# Altium PCB mcb.PcbDoc (part 1 of 2)
Units mm, origin at the board's own origin, x right, y up, seen from the top; angles counter-clockwise.
Board outline 144 x 86 mm, 4 copper layers (Top Layer, GND Plane, PWR Plane, Bottom Layer), stack 1.537 mm thick; 157 components, 137 nets, 622 pads, 241 vias.
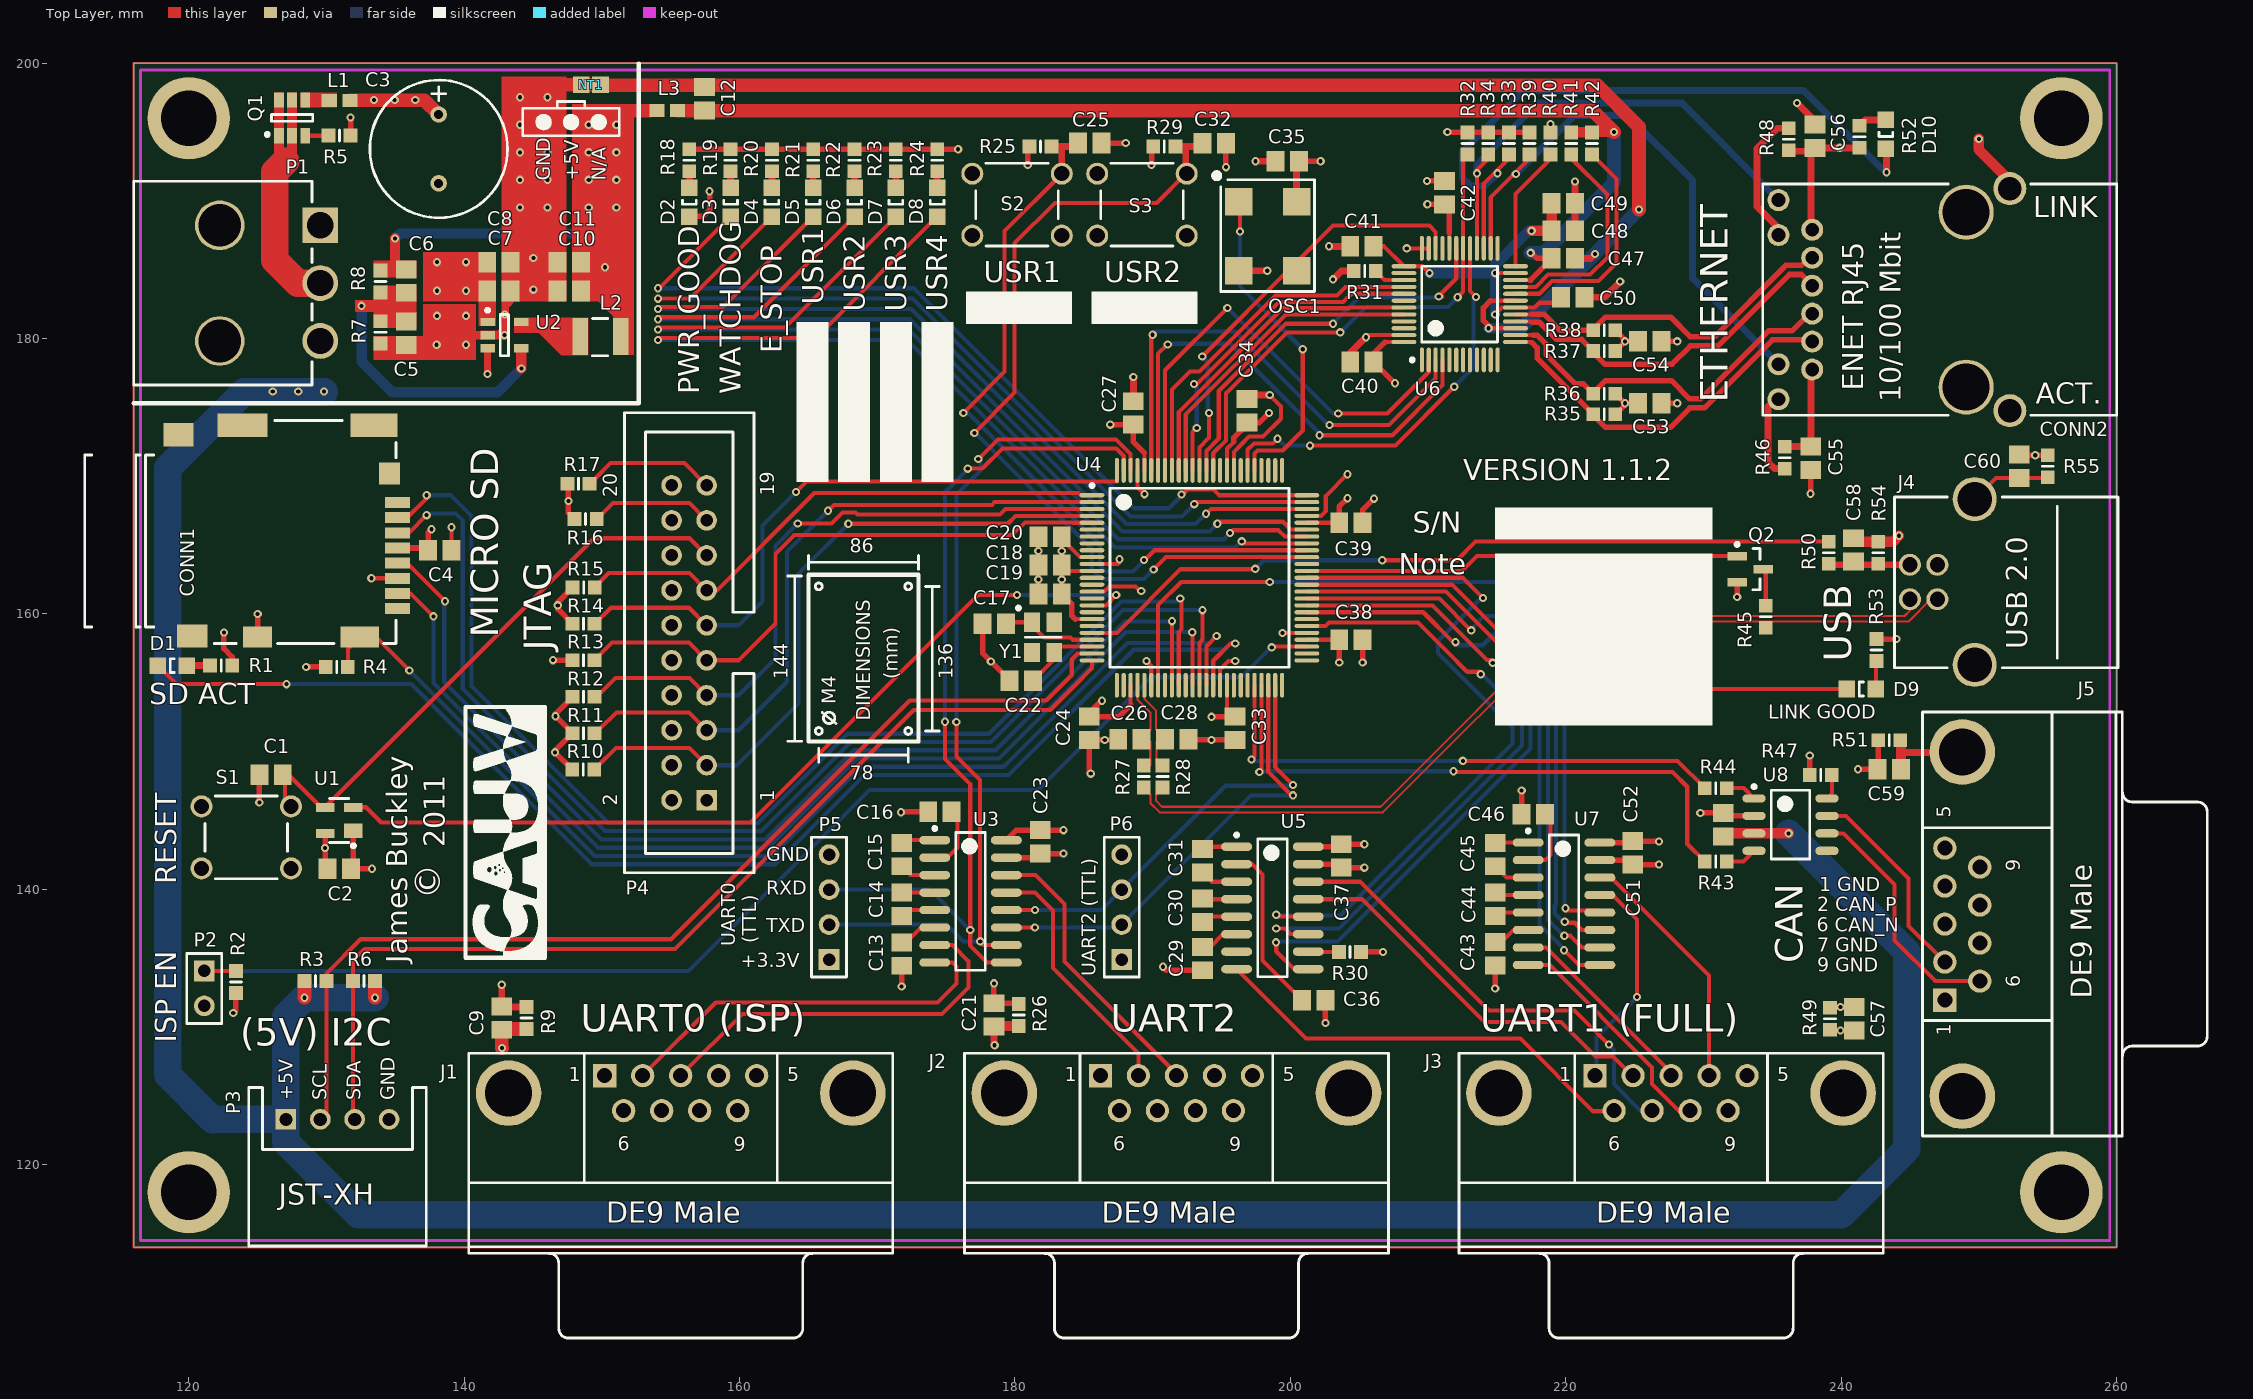
[diagram p0: Top Layer view]
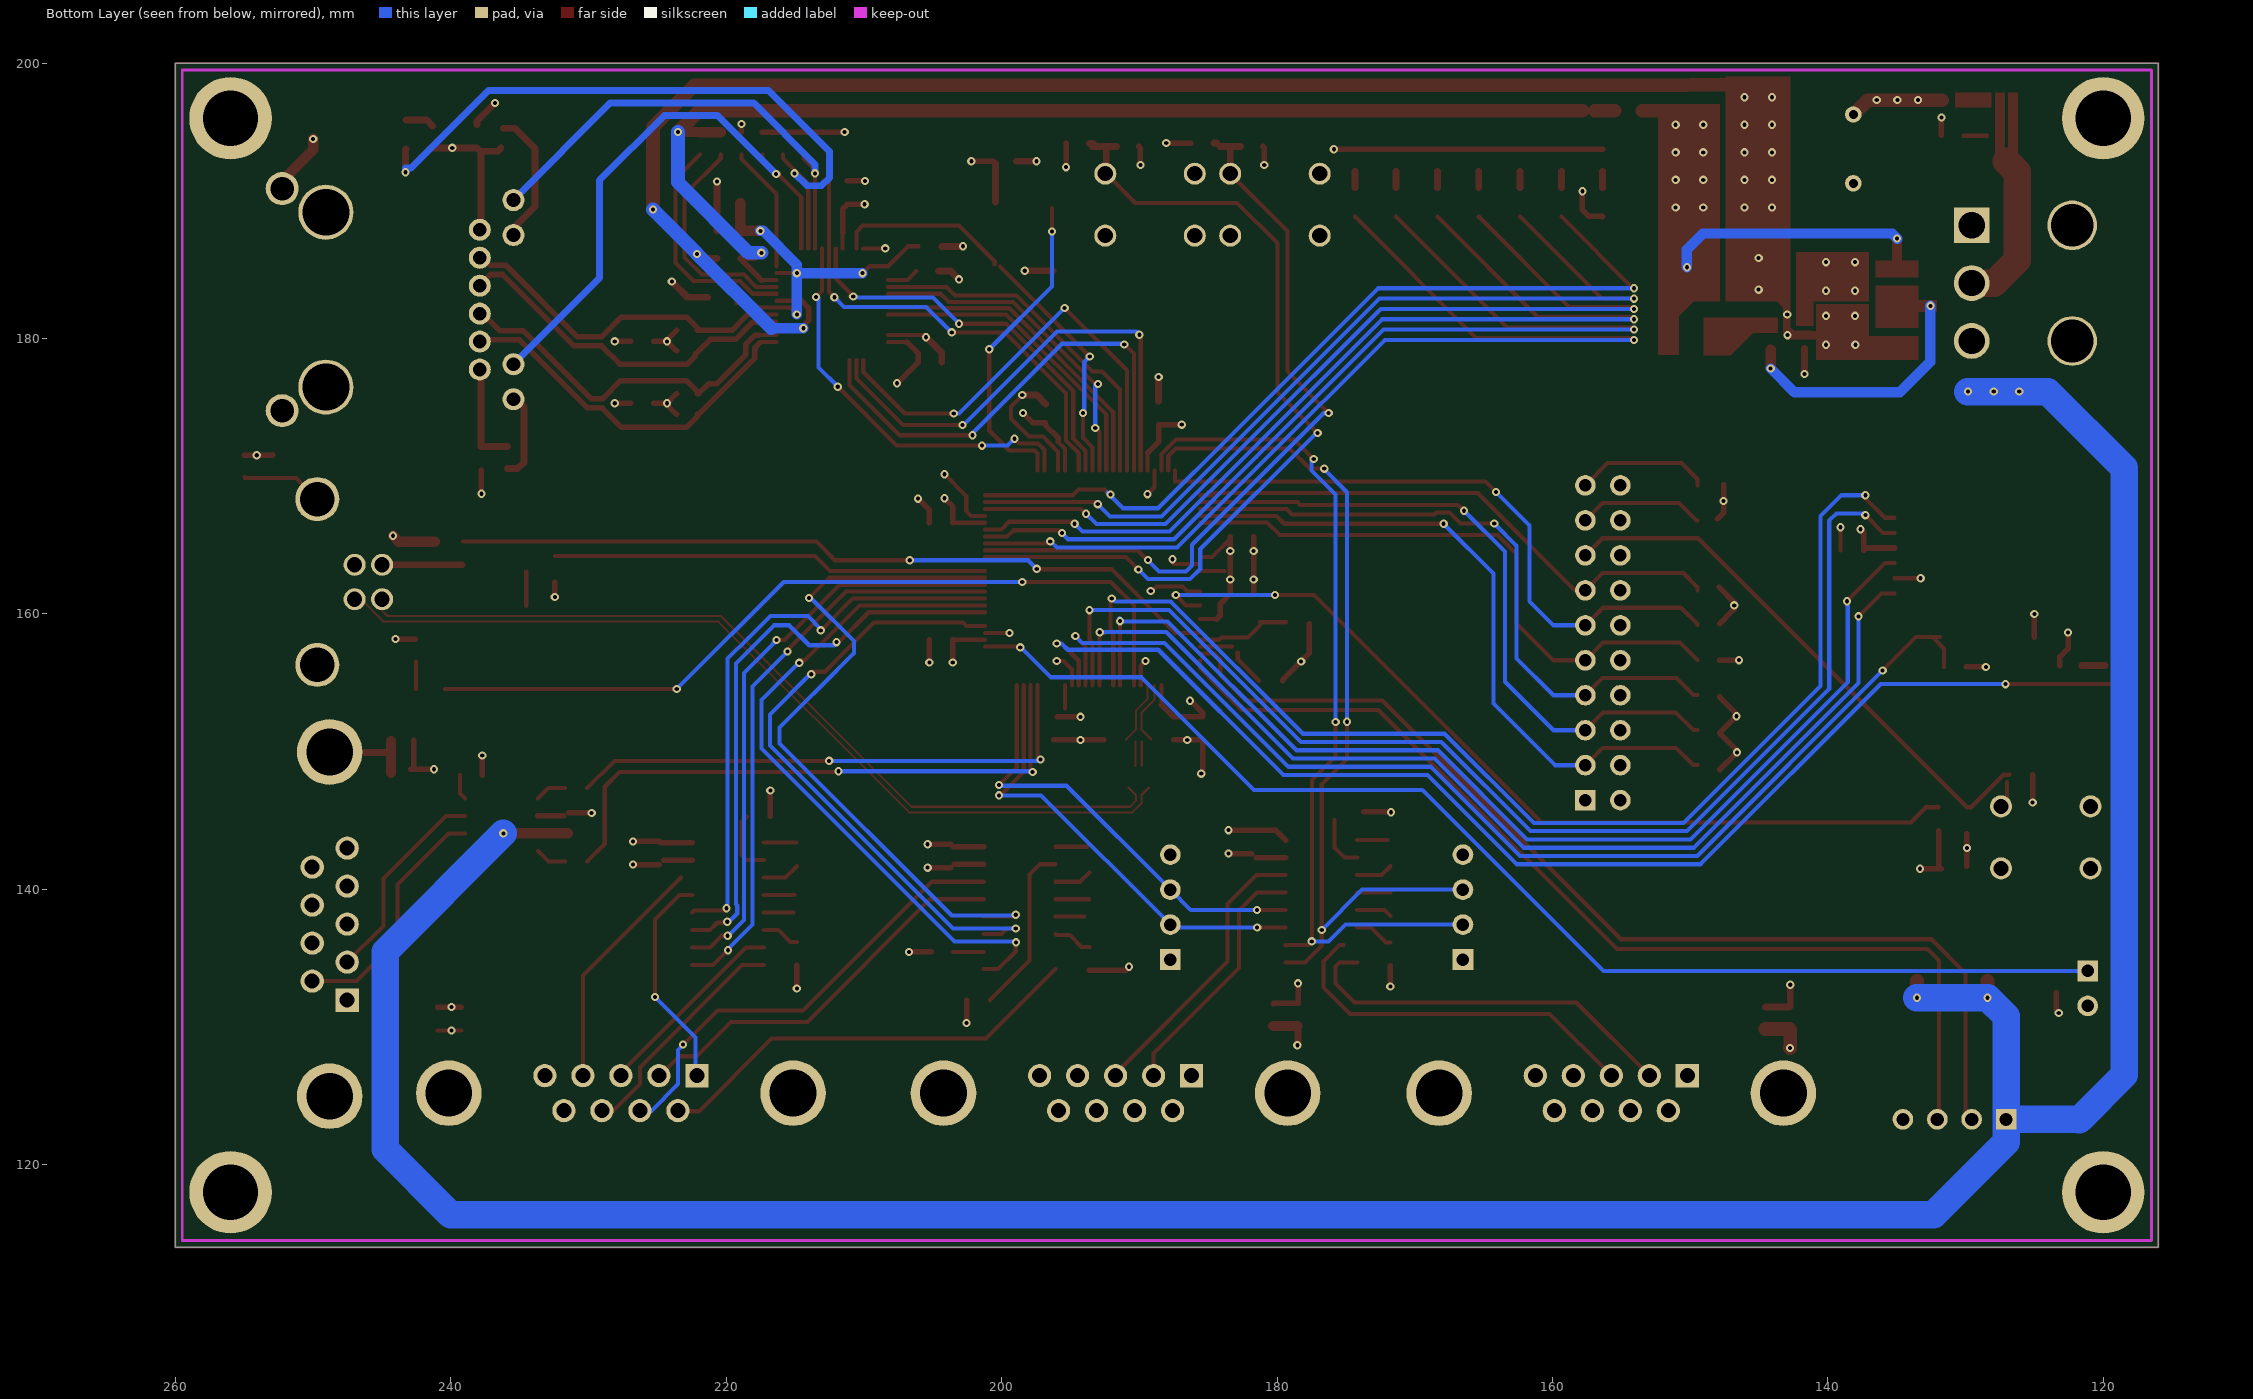
[diagram p1: Bottom Layer view, seen from below]
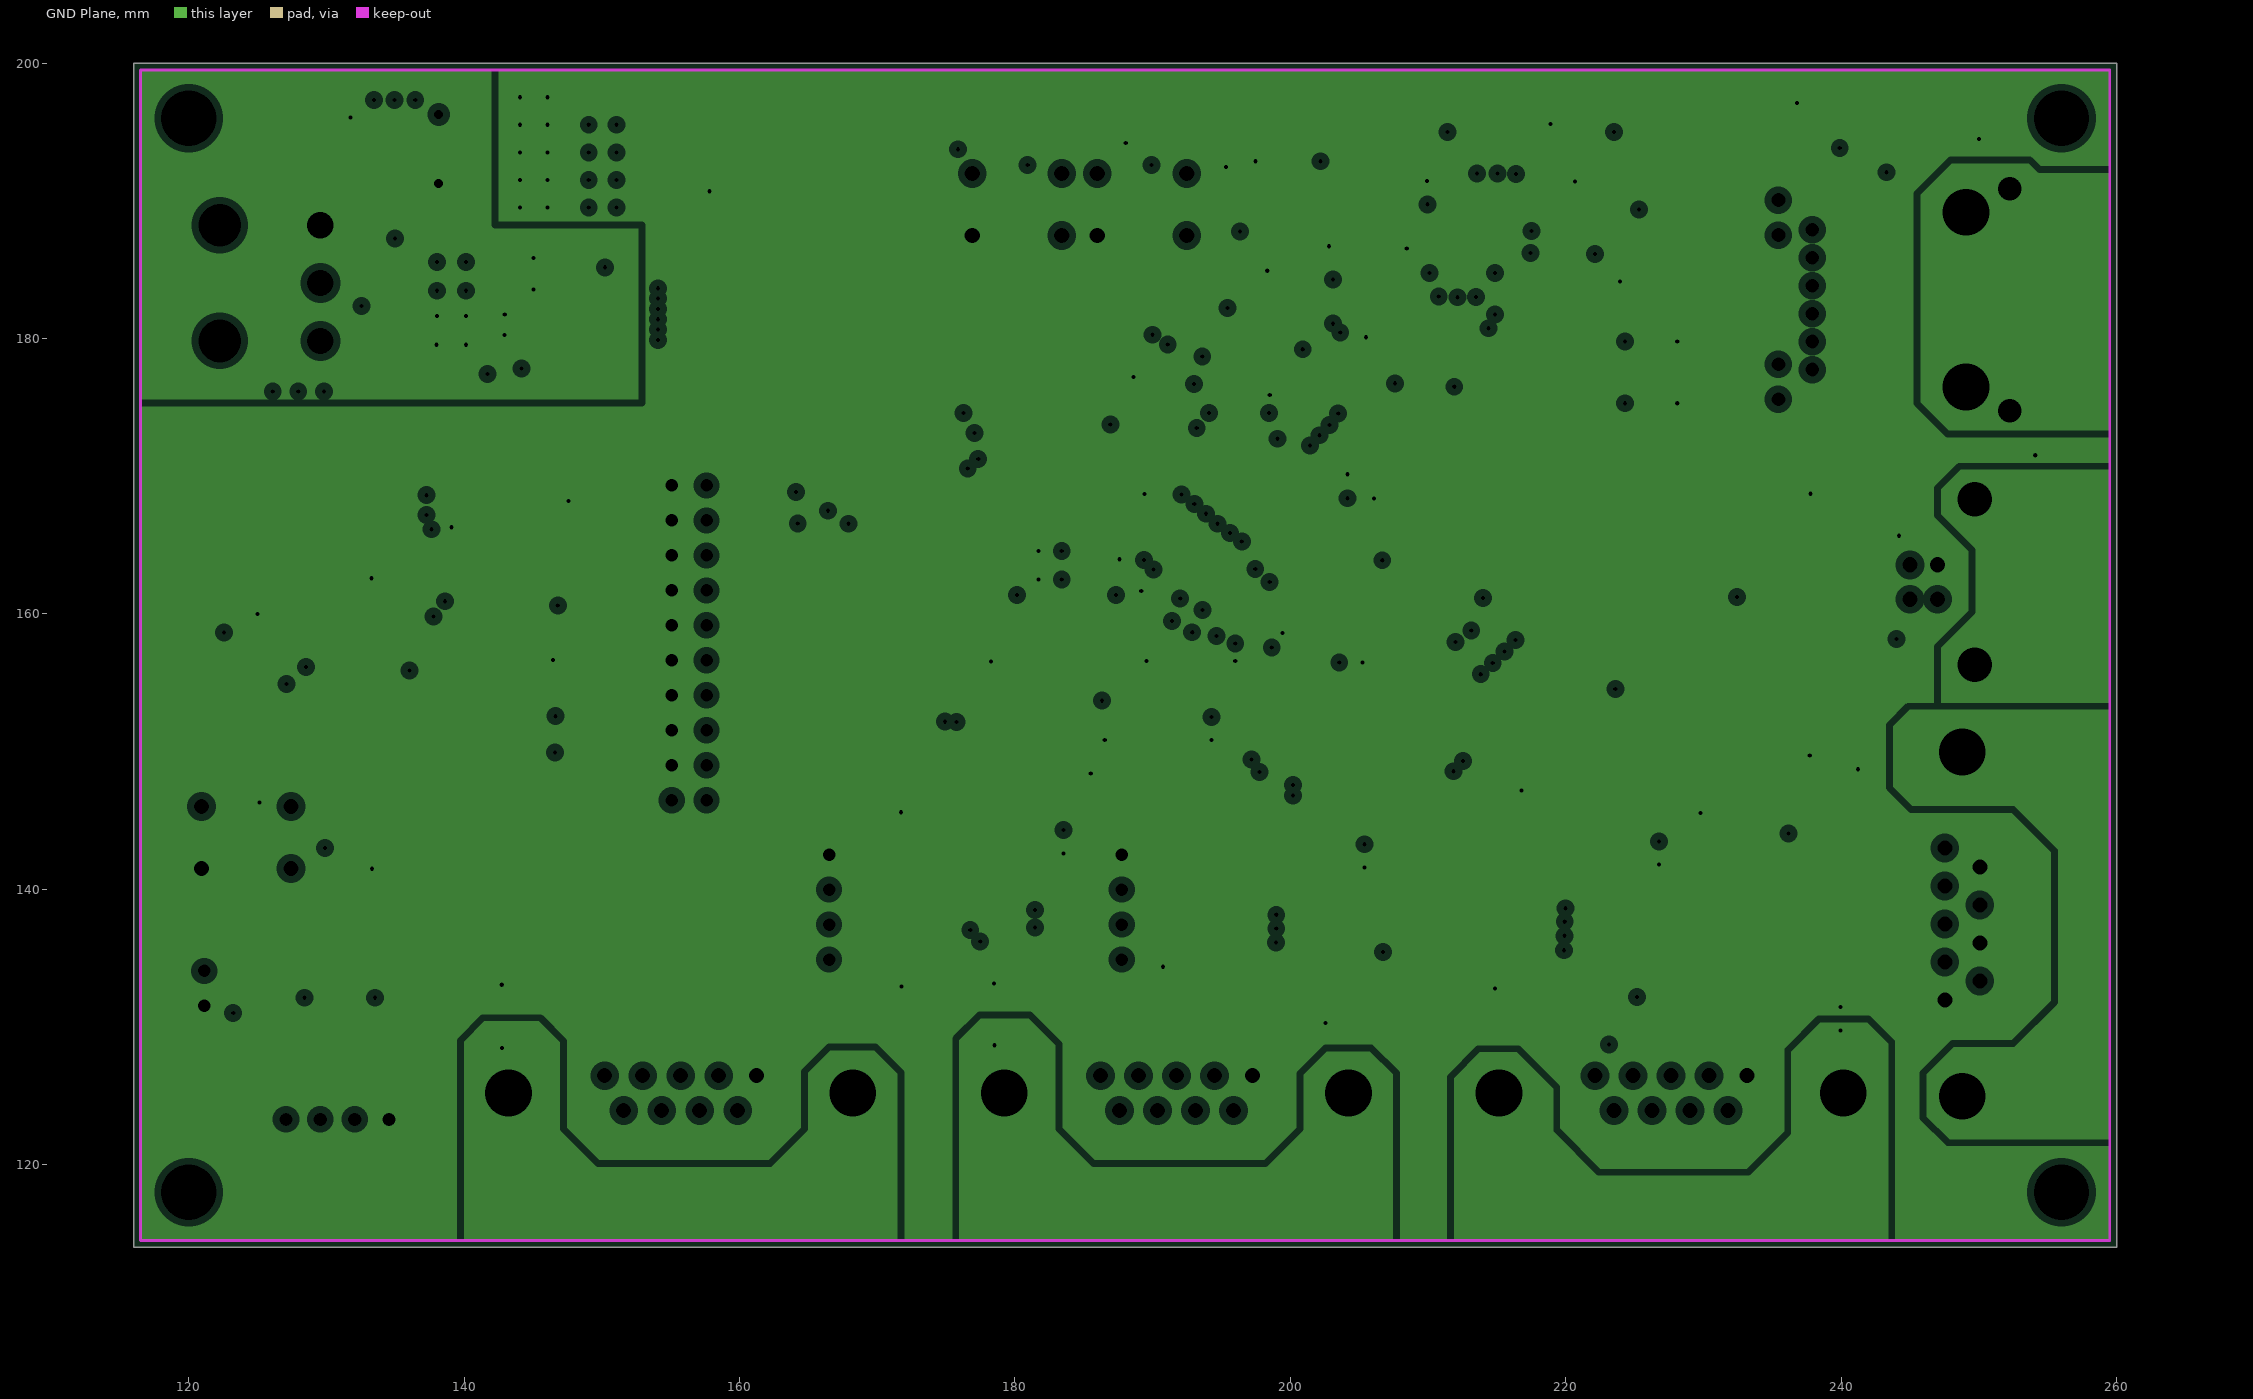
[diagram p2: GND Plane, clearances drawn from the general rule]
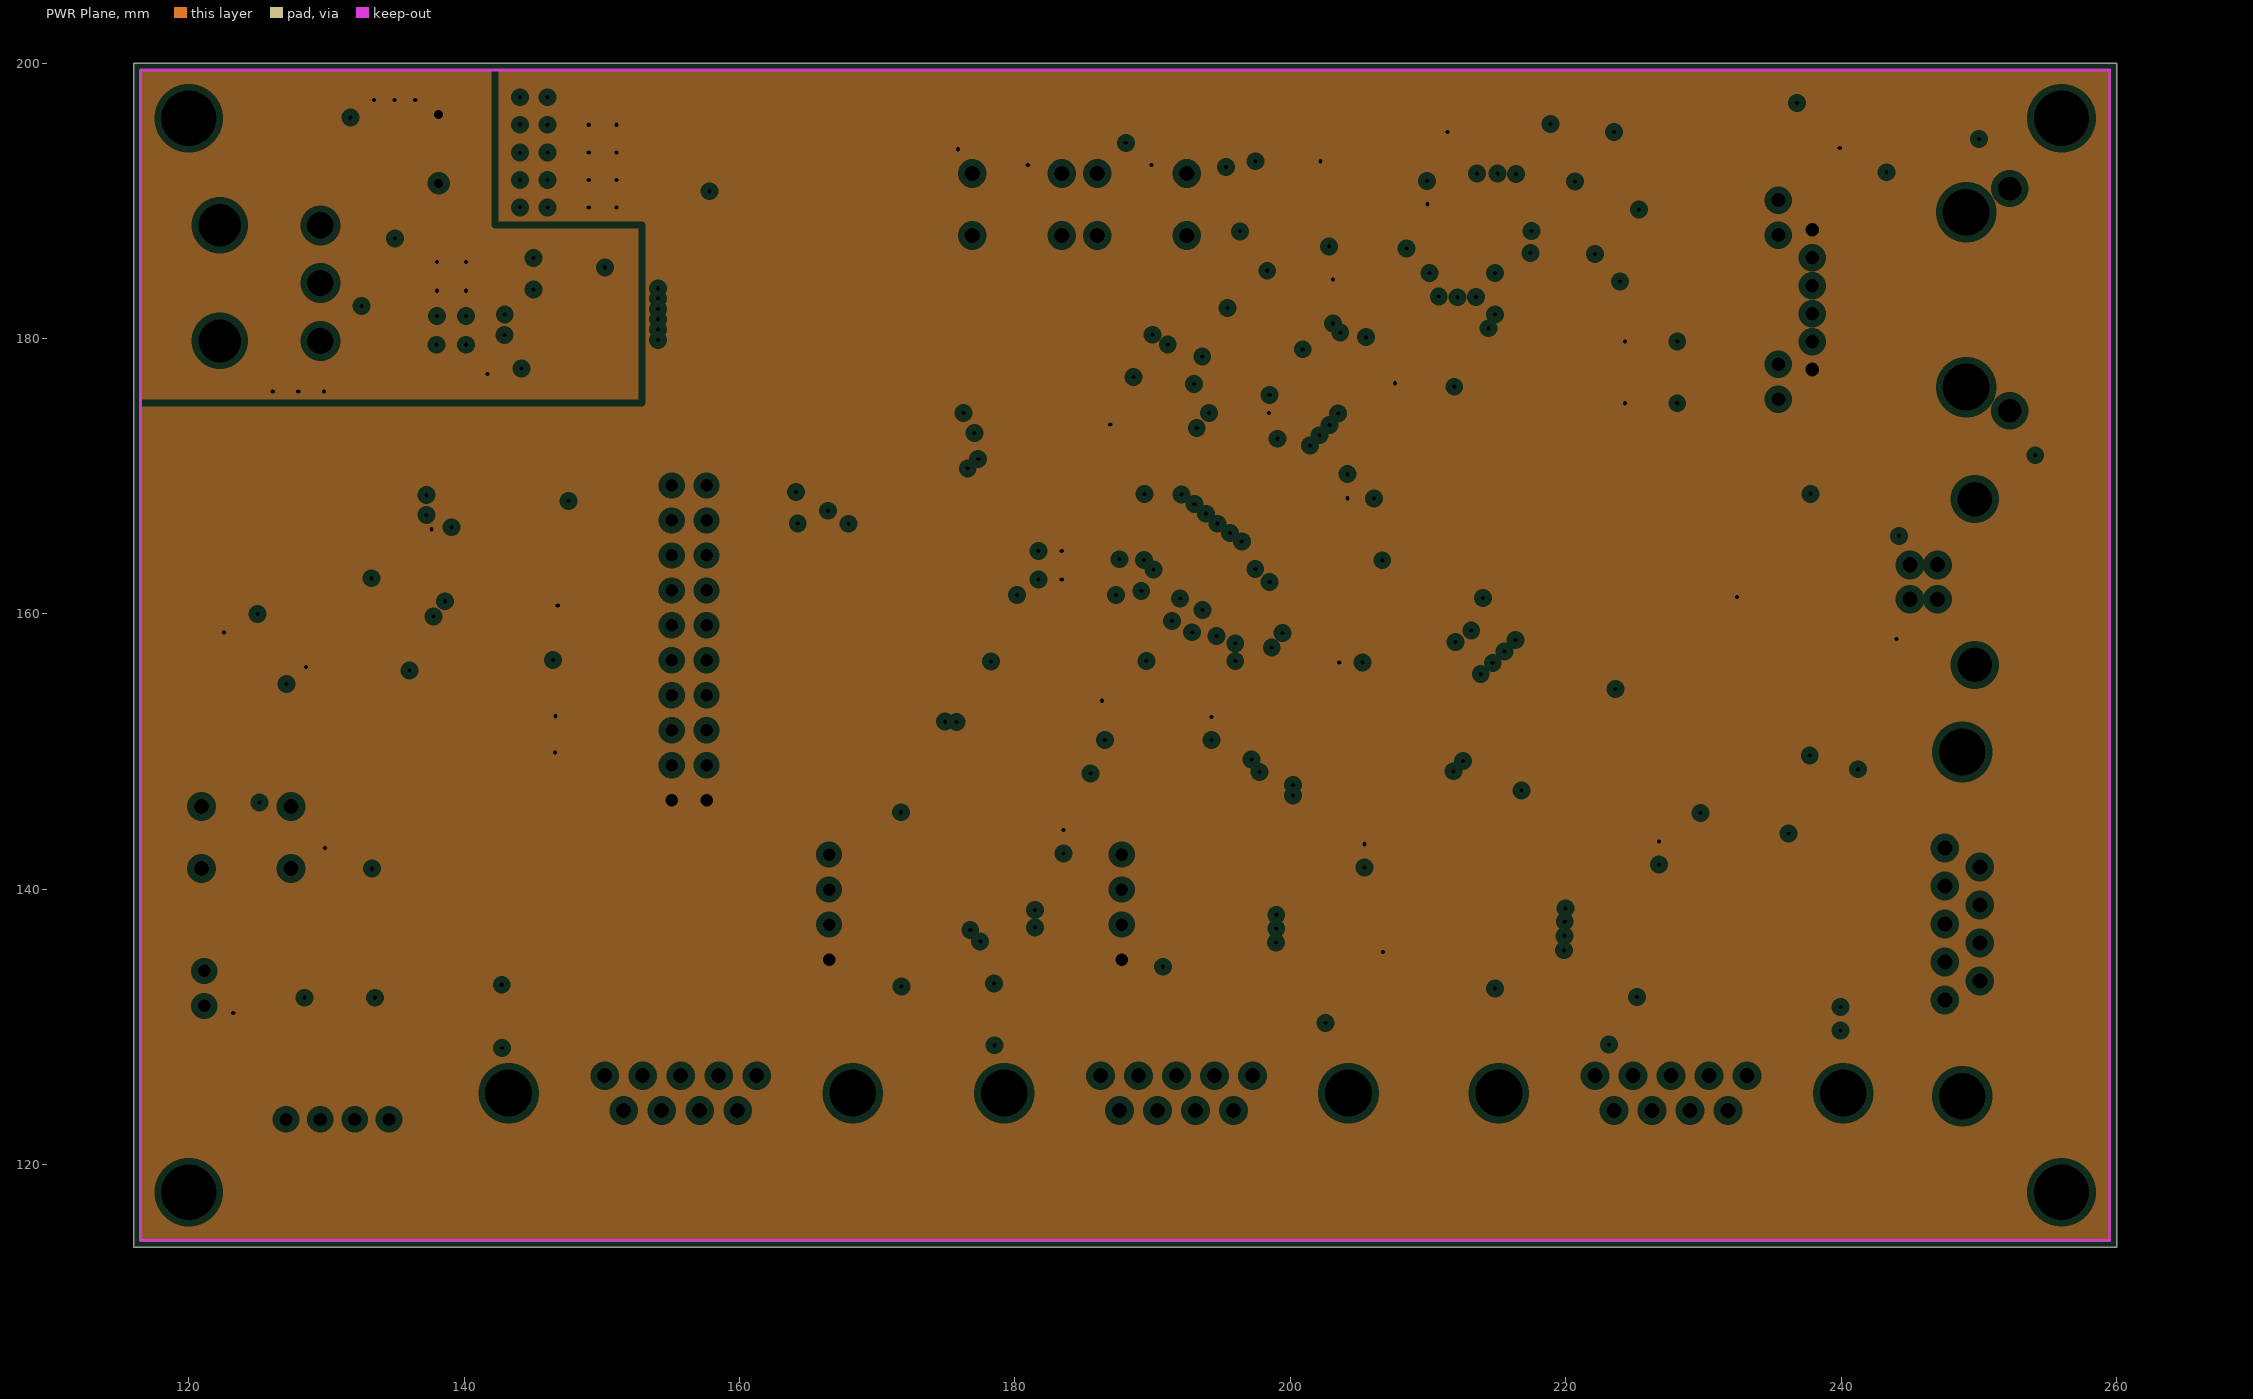
[diagram p3: PWR Plane, clearances drawn from the general rule]

## Layer stack, top to bottom
Top Layer: signal copper 0.018
Dielectric: core 0.22, FR-4, Dk 4.2
GND Plane: plane copper 0.035, net (Multiple Nets)
Dielectric: prepreg 0.9906, FR-4, Dk 4.55
PWR Plane: plane copper 0.035, net (Multiple Nets)
Dielectric: core 0.22, FR-4, Dk 4.2
Bottom Layer: signal copper 0.018

## Board outline
116,114 260,114 260,200 116,200

## Design rules (kind name [scope] priority, off if disabled: settings)
Clearance [All] p1: gap=0.15
DiffPairsRouting [All] p1: maxlimit=0.254 minlimit=0.254 mostfreqgap=0.254 maxuncoupledlength=12.7
HoleSize [All] p1: absolutevalues=TRUE maxlimit=10 minlimit=0.2 maxpercent=80.000 minpercent=20.000
HoleToHoleClearance [All] p1: gap=0.15 allowstackedmicrovias=TRUE
MinimumAnnularRing [All] p1: minimumring=0.125
MinimumSolderMaskSliver [All] p1: minsoldermaskwidth=0.125
PlaneClearance [All] p1: clearance=0.5
PlaneConnect [All] p1: planeconnectstyle=Relief reliefexpansion=0.5 reliefentries=4 reliefconductorwidth=0.3 reliefairgap=0.2
PolygonConnect [All] p1: connectstyle=Relief reliefconductorwidth=0.3 reliefentries=4 polygonreliefangle="90 Angle"
RoomDefinition U3_room [U4] p1: confinementstyle=ConfineOut formatcopy=TRUE lockcomponents=FALSE outline 184.4,171.625 202.4,171.625 202.4,153.625 184.4,153.625
RoomDefinition U2_room [U6] p2: confinementstyle=ConfineOut formatcopy=TRUE lockcomponents=FALSE outline 207.1,187.7 217.5,187.7 217.5,177.3 207.1,177.3
RoutingVias [All] p1: holewidth=0.3 width=0.6 viastyle="Through Hole" minholewidth=0.3 minwidth=0.6 maxholewidth=0.3 maxwidth=0.6
SilkToSilkClearance [All] p1: silktosilkclearance=0.2
SilkscreenOverComponentPads [All] p1: minsilkscreentomaskgap=0.2
SolderMaskExpansion [All] p1: expansion=0.125
Width Width_Usb [InNetClass('Usb')] p1: maxlimit=0.15 minlimit=0.15 preferedwidth=0.15
Width Width_ICs [(WithinRoom('U2_room') OR WithinRoom('U3_room')) AND OnTopLayer] p2: maxlimit=10 minlimit=0.2 preferedwidth=0.3
Width Width_ethernet [InNetClass('Ethernet')] p3: maxlimit=0.4 minlimit=0.2 preferedwidth=0.4
Width PWR [InNet('+3.3') OR InNet('+5') OR InNet('+3.3A') OR InNet(GND) OR InNet(AGND)] p4: maxlimit=10 minlimit=0.15 preferedwidth=0.4
Width [All] p5: maxlimit=10 minlimit=0.15 preferedwidth=0.3
20 further rules are at their usual default settings.

## Classes and differential pairs
component class uart1: C29 C30 C31 C36 C37 C43 C44 C45 C46 C51 C57 J3 R30 R49 U5 U7
component class uart0: C9 C13 C14 C15 C16 C21 C23 J1 J2 P5 P6 R9 R26 U3
component class mcu: U4
component class can: C52 C59 J5 R43 R44 R47 R51 U8
net class Usb: USB_C_N USB_C_P USB_H_N USB_H_P
component class reset: C1 C2 P2 R2 S1 U1 U10
component class jtag: C17 C18 C19 C20 C22 C24 C27 C33 C34 C38 C39 P4 R10 R11 R12 R13 R14 R15 R16 R17 Y1
component class i2c: P3 R3 R6
component class ethernet: C35 C40 C41 C42 C47 C48 C49 C50 C53 C54 C55 C56 C70 CONN2 D10 OSC1 R31 R32 R33 R34 R35 R36 R37 R38 R39 R40 R41 R42 R46 R48 R52 U6
component class io: C25 C32 D3 D4 D5 D6 D7 D8 R19 R20 R21 R22 R23 R24 R25 R29 R58 R59 S2 S3
component class sdcard: C4 CONN1 D1 R1 R4
component class usb: C26 C28 C58 C60 D9 J4 Q2 Q3 R27 R28 R45 R50 R53 R54 R55
net class JTAG[5..0]: JTAG0 JTAG1 JTAG2 JTAG3 JTAG4 JTAG5
component class power: C3 C5 C6 C7 C8 C10 C11 C12 C66 C? D2 L1 L2 L3 L4 NT1 P1 Q1 R5 R7 R8 R18 U2
net class Ethernet: ENET_RD_N ENET_RD_P ENET_TD_N ENET_TD_P
differential pair CAN: +CAN_P -CAN_N
differential pair ENET_RD: +ENET_RD_P -ENET_RD_N
differential pair ENET_TD: +ENET_TD_P -ENET_TD_N
differential pair USB_C: +USB_C_P -USB_C_N
differential pair USB_H: +USB_H_P -USB_H_N

## Components (designator, comment, footprint, x,y, rotation, side; value= is the part's Value field where it differs from the comment)
C1 "Cap" C0805C104K5RACTU 125.975,148.325 r0 top
C2 "Cap" C0805C104K5RACTU 130.925,141.5 r180 top (schematic designator C7)
C3 "Cap Pol1" ECA1HM471 138.15,193.775 r270 top (schematic designator C11)
C4 "Cap" C0805C104K5RACTU 138.225,164.625 r180 top (schematic designator C10)
C5 "Cap" C0805C104K5RACTU 135.8,180.375 r90 top (schematic designator C2)
C6 "Cap" C0805C104K5RACTU 135.8,184.175 r90 top (schematic designator C3)
C7 "Cap" C0805C104K5RACTU 142.525,183.45 r180 top (schematic designator C4)
C8 "Cap" C0805C104K5RACTU 142.525,185.55 r180 top (schematic designator C5)
C9 "Cap" C0805C104K5RACTU 142.727,130.652 r90 top (schematic designator C17)
C10 "Cap" C0805C104K5RACTU 147.625,183.45 r0 top (schematic designator C8)
C11 "Cap" C0805C104K5RACTU 147.625,185.55 r0 top (schematic designator C9)
C12 "Cap" C0805C104K5RACTU 157.45,197.425 r270 top (schematic designator C66)
C13 "Cap" C0805C104K5RACTU 171.773,135.302 r90 top (schematic designator C18)
C14 "Cap" C0805C104K5RACTU 171.773,138.927 r90 top (schematic designator C19)
C15 "Cap" C0805C104K5RACTU 171.773,142.527 r90 top (schematic designator C20)
C16 "Cap" C0805C104K5RACTU 174.55,145.625 r0 top (schematic designator C21)
C17 "Cap" C0805C104K5RACTU 178.5,159.3 r180 top (schematic designator C22)
C18 "Cap" C0805C104K5RACTU 182.55,163.55 r180 top (schematic designator C25)
C19 "Cap" C0805C104K5RACTU 182.55,161.45 r180 top (schematic designator C24)
C20 "Cap" C0805C104K5RACTU 182.55,165.6 r180 top (schematic designator C26)
C21 "Cap" C0805C104K5RACTU 178.475,130.875 r90 top (schematic designator C28)
C22 "Cap" C0805C104K5RACTU 180.45,155.15 r180 top (schematic designator C23)
C23 "Cap" C0805C104K5RACTU 181.825,143.45 r90 top (schematic designator C30)
C24 "Cap" C0805C104K5RACTU 185.4,151.7 r270 top (schematic designator C29)
C25 "Cap" C0805C104K5RACTU 185.425,194.2 r180 top (schematic designator C27)
C26 "Cap" C0805C104K5RACTU 188.35,150.9 r180 top (schematic designator C31)
C27 "Cap" C0805C104K5RACTU 188.6,174.6 r90 top (schematic designator C32)
C28 "Cap" C0805C104K5RACTU 191.75,150.9 r0 top (schematic designator C33)
C29 "Cap" C0805C104K5RACTU 193.625,134.975 r90 top (schematic designator C35)
C30 "Cap" C0805C104K5RACTU 193.625,138.475 r90 top (schematic designator C36)
C31 "Cap" C0805C104K5RACTU 193.625,142.075 r90 top (schematic designator C37)
C32 "Cap" C0805C104K5RACTU 194.475,194.175 r180 top (schematic designator C34)
C33 "Cap" C0805C104K5RACTU 195.975,151.7 r270 top (schematic designator C39)
C34 "Cap" C0805C104K5RACTU 196.85,174.75 r90 top (schematic designator C40)
C35 "Cap" C0805C104K5RACTU 199.775,192.875 r0 top (schematic designator C41)
C36 "Cap" C0805C104K5RACTU 201.7,131.95 r180 top (schematic designator C38)
C37 "Cap" C0805C104K5RACTU 203.7,142.425 r90 top (schematic designator C44)
C38 "Cap" C0805C104K5RACTU 204.4,158.125 r0 top (schematic designator C42)
C39 "Cap" C0805C104K5RACTU 204.4,166.625 r0 top (schematic designator C43)
C40 "Cap" C0805C104K5RACTU 205.2,178.3 r0 top (schematic designator C45)
C41 "Cap" C0805C104K5RACTU 205.2,186.7 r0 top (schematic designator C46)
C42 "Cap" C0805C104K5RACTU 211.2,190.6 r270 top (schematic designator C51)
C43 "Cap" C0805C104K5RACTU 214.875,135.325 r90 top (schematic designator C47)
C44 "Cap" C0805C104K5RACTU 214.875,138.925 r90 top (schematic designator C48)
C45 "Cap" C0805C104K5RACTU 214.875,142.525 r90 top (schematic designator C49)
C46 "Cap" C0805C104K5RACTU 217.65,145.45 r0 top (schematic designator C50)
C47 "Cap" C0805C104K5RACTU 219.825,185.825 r180 top (schematic designator C52)
C48 "Cap" C0805C104K5RACTU 219.825,187.825 r180 top (schematic designator C53)
C49 "Cap" C0805C104K5RACTU 219.825,189.825 r180 top (schematic designator C54)
C50 "Cap" C0805C104K5RACTU 220.5,183 r180 top (schematic designator C56)
C51 "Cap" C0805C104K5RACTU 224.875,142.65 r90 top (schematic designator C57)
C52 "Cap" C0805C104K5RACTU 231.45,144.7 r270 top (schematic designator C55)
C53 "Cap" C0805C104K5RACTU 226.1,175.3 r180 top (schematic designator C58)
C54 "Cap" C0805C104K5RACTU 226.1,179.8 r180 top (schematic designator C59)
C55 "Cap" C0805C104K5RACTU 237.8,171.3 r270 top (schematic designator C60)
C56 "Cap" C0805C104K5RACTU 238.1,194.7 r90 top (schematic designator C61)
C57 "Cap" C0805C104K5RACTU 240.95,130.6 r90 top (schematic designator C62)
C58 "Cap" C0805C104K5RACTU 240.9,164.65 r90 top (schematic designator C63)
C59 "Cap" C0805C104K5RACTU 243.5,148.725 r180 top (schematic designator C64)
C60 "Cap" C0805C104K5RACTU 252.925,170.725 r90 top (schematic designator C65)
CONN1 "MICROSD_CONNECTOR" MICROSD_SLOT 118.45,157.55 r270 top
CONN2 "RJ45 JACK" RJMG163118101NR 237.9,182.825 r90 top
D1 "" LGR971-Z 119.85,156.25 r180 top
D2 "" LGR971-Z 156.35,190.95 r270 top (schematic designator D4)
D3 "" LGR971-Z 159.35,190.95 r270 top (schematic designator D5)
D4 "" LGR971-Z 162.35,190.95 r270 top (schematic designator D6)
D5 "" LGR971-Z 165.35,190.95 r270 top (schematic designator D7)
D6 "" LGR971-Z 168.35,190.95 r270 top (schematic designator D8)
D7 "" LGR971-Z 171.35,190.95 r270 top (schematic designator D9)
D8 "" LGR971-Z 174.35,190.95 r270 top (schematic designator D10)
D9 "" LGR971-Z 242.525,154.55 r180 top (schematic designator D11)
D10 "" LGR971-Z 243.25,195.875 r270 top (schematic designator D12)
J1 "D Connector 9 Male" DSUB_MALE 155.725,125.2 r0 top (schematic designator J3)
J2 "D Connector 9 Male" DSUB_MALE 191.725,125.2 r0 top (schematic designator J4)
J3 "D Connector 9 Male" DSUB_MALE 227.65,125.2 r0 top (schematic designator J5)
J4 "USB_CONN" USB_B_292304-1 249.7,156.3 r90 top (schematic designator J6)
J5 "D Connector 9 Male" DSUB_MALE 248.8,137.475 r90 top (schematic designator J7)
L1 "Ferrite Bead" BLM18AG221SN1D 130.95,197.3 r0 top (schematic designator L2)
L2 "Inductor" B82422H1222K 148.425,180.15 r0 top (schematic designator L1)
L3 "Ferrite Bead" BLM18AG221SN1D 154.75,196.55 r0 top (schematic designator L4)
NT1 "Net Tie" NetTie 148.7,198.425 r0 top net-tie
OSC1 "OSC" XO91050UITA 196.25,189.925 r270 top
P1 "Header 3H" "MOLEX - 39303035" 129.55,184.025 r270 top (schematic designator P6)
P2 "Header 2" HDR1X2 121.125,134.075 r270 top (schematic designator P1)
P3 "Header 4H" JST_S4B-XH-A 134.55,125.6 r180 top
P4 "Header 10X2" HDR2X10 157.61,146.475 r90 top (schematic designator P2)
P5 "Header 4" HDR1X4 166.5,134.9 r90 top (schematic designator P4)
P6 "Header 4" HDR1X4 187.75,134.9 r90 top (schematic designator P5)
Q1 "PMOSFET_P" FDC608PZ 127.5,196.025 r90 top (schematic designator Q2)
Q2 "MOSFET-P" BSH201,215 233.4,163.25 r0 top (schematic designator Q1)
R1 "Res" MC0603 122.35,156.25 r0 top (schematic designator R4)
R2 "Res" MC0603 123.425,133.275 r270 top (schematic designator R3)
R3 "Res" MC0603 129.2,133.35 r180 top (schematic designator R48)
R4 "Res" MC0603 130.75,156.15 r180 top (schematic designator R7)
R5 "Res" MC0603 130.95,194.75 r180 top (schematic designator R12)
R6 "Res" MC0603 132.725,133.35 r0 top (schematic designator R50)
R7 "Res" MC0603 133.925,180.45 r90 top (schematic designator R1)
R8 "Res" MC0603 133.925,184.15 r90 top (schematic designator R2)
R9 "Res" MC0603 144.527,130.652 r270 top (schematic designator R16)
R10 "Res" MC0603 148.65,148.7 r180 top (schematic designator R15)
R11 "Res" MC0603 148.66,151.34 r180 top (schematic designator R13)
R12 "Res" MC0603 148.66,153.98 r180 top (schematic designator R11)
R13 "Res" MC0603 148.66,156.645 r180 top (schematic designator R10)
R14 "Res" MC0603 148.66,159.285 r0 top (schematic designator R9)
R15 "Res" MC0603 148.675,161.925 r180 top (schematic designator R8)
R16 "Res" MC0603 148.82,166.9 r0 top (schematic designator R6)
R17 "Res" MC0603 148.3,169.45 r0 top (schematic designator R5)
R18 "Res" MC0603 156.35,192.95 r90 top (schematic designator R17)
R19 "Res" MC0603 159.35,192.95 r90 top (schematic designator R18)
R20 "Res" MC0603 162.35,192.95 r90 top (schematic designator R19)
R21 "Res" MC0603 165.35,192.95 r90 top (schematic designator R20)
R22 "Res" MC0603 168.35,192.95 r90 top (schematic designator R21)
R23 "Res" MC0603 171.35,192.95 r90 top (schematic designator R22)
R24 "Res" MC0603 174.35,192.95 r90 top (schematic designator R23)
R25 "Res" MC0603 181.85,193.95 r180 top (schematic designator R24)
R26 "Res" MC0603 180.275,130.875 r270 top (schematic designator R25)
R27 "Res" MC0603 189.35,148.2 r270 top (schematic designator R26)
R28 "Res" MC0603 190.725,148.2 r270 top (schematic designator R27)
R29 "Res" MC0603 190.85,193.95 r180 top (schematic designator R28)
R30 "Res" MC0603 204.325,135.45 r0 top (schematic designator R29)
R31 "Res" MC0603 205.4,184.9 r180 top (schematic designator R30)
R32 "Res" MC0603 212.875,194.175 r90 top (schematic designator R31)
R33 "Res" MC0603 215.875,194.175 r90 top
R34 "Res" MC0603 214.375,194.175 r90 top (schematic designator R32)
R35 "Res" MC0603 222.8,174.5 r0 top
R36 "Res" MC0603 222.8,176 r0 top (schematic designator R34)
R37 "Res" MC0603 222.8,179.1 r0 top
R38 "Res" MC0603 222.8,180.6 r0 top (schematic designator R36)
R39 "Res" MC0603 217.375,194.175 r90 top
R40 "Res" MC0603 218.9,194.175 r270 top (schematic designator R38)
R41 "Res" MC0603 220.4,194.175 r90 top (schematic designator R40)
R42 "Res" MC0603 221.9,194.175 r90 top (schematic designator R43)
R43 "Res" MC0603 230.9,142.025 r180 top (schematic designator R41)
R44 "Res" MC0603 230.9,147.35 r180 top (schematic designator R42)
R45 "Res" MC0603 234.525,159.8 r90 top
R46 "Res" MC0603 235.9,171.35 r90 top
R47 "Res" MC0603 238.525,148.3 r0 top (schematic designator R44)
R48 "Res" MC0603 236.2,194.475 r270 top (schematic designator R47)
R49 "Res" MC0603 239.2,130.6 r270 top (schematic designator R52)
R50 "Res" MC0603 239.1,164.45 r270 top (schematic designator R49)
R51 "Res" MC0603 243.5,150.825 r0 top (schematic designator R53)
R52 "Res" MC0603 241.325,194.65 r270 top (schematic designator R51)
R53 "Res" MC0603 242.575,157.375 r90 top (schematic designator R54)
R54 "Res" MC0603 242.7,164.45 r270 top (schematic designator R55)
R55 "Res" MC0603 255,170.725 r270 top (schematic designator R56)
S1 "SW-PB" B3F-1000 120.925,141.525 r0 top
S2 "SW-PB" B3F-1000 176.9,187.475 r0 top
S3 "SW-PB" B3F-1000 185.975,187.475 r0 top
U1 "STM811" STM811 130.925,145 r180 top
U2 "LM3674" LM3674MF-ADJ 142.925,180.25 r0 top
U3 "MAX3232CSE" MAX3232ECDG4 176.773,139.127 r0 top (schematic designator U4)
U4 "LPC1768" LPC1768 193.4,162.625 r0 top (schematic designator U5)
U5 "MAX3232CSE" MAX3232ECDG4 198.7,138.65 r0 top (schematic designator U6)
U6 "DP83848I" DP83848IVV 212.3,182.5 r90 top (schematic designator U7)
U7 "MAX3232CSE" MAX3232ECDG4 219.875,138.95 r0 top (schematic designator U8)
U8 "MCP2551" MCP2551-I/SN 236.325,144.7 r0 top (schematic designator U9)
Y1 "XTAL" C3E-24.000-12-3030-X 181.25,159.4 r270 top

## Footprints (in the part's own frame and the unit in brackets; to place one, negate y for a bottom-side part, rotate by r counter-clockwise, add the part's x,y. Pads: shape width x height; smd on the part's side, far side on the other; paste and mask are expansions set on the pad)
B3F-1000 [mm] "OMRON ELECTRONIC COMPONENTS - B3F-1000 - SWITCH, FLAT, SPNO"
  round 1.6 hole 1.1: 1(0,0) 2(6.5,0) 3(6.5,4.5) 4(0,4.5)
  silkscreen extent 0.25,-0.75 6.25,5.25, body extent 0.25,-0.75 6.25,5.25, height 4.3
B82422H1222K [mm] "EPCOS - B82422H1222K - INDUCTOR, 1210 CASE, SIMID H, 2.2UH"
  rect 1.15x2.7 smd: 1(0,0) 2(2.95,0)
  silkscreen extent 0.9,-1.4 2,1.3, body extent -0.6,-1.4 3.6,1.4, height 2.2
BLM18AG221SN1D [mm] "MURATA - BLM18AG221SN1D - FERRITE BEAD, 0603 CASE, 220OHM"
  rect 1.1x0.95 smd: 1(-0.75,0) 2(0.75,0)
  body extent -0.88,-0.48 0.87,0.48, height 0.95
BSH201,215 [mm]
  rect 1.4x0.6 smd: 1(0.95,0) 2(-0.95,0.95) 3(-0.95,-0.95)
  silkscreen extent -1.07,-1.5 0.7,1.92, body extent -0.7,-1.5 0.7,1.5, height 1.1
C3E-24.000-12-3030-X [mm]
  rect 1.4x1.15 smd: 1(0,0) 2(2.2,1.6) 3(2.2,0) 4(0,1.6)
  silkscreen extent -1.15,-1.12 1.1,2.1, body extent -0.6,-0.5 2.8,2.1, height 0.75
C0805C104K5RACTU [mm] "KEMET - C0805C104K5RACTU - CAPACITOR, 0805, 100NF, 50V, X7R"
  rect 1.3x1.5 smd: 1(-0.85,0) 2(0.85,0)
  body extent -1.1,-0.72 1.1,0.72, height 0.87
DP83848IVV [mm]
  oval 1.8x0.3 smd: 1(-4.05,2.75) 2(-4.05,2.25) 3(-4.05,1.75) 4(-4.05,1.25) 5(-4.05,0.75) 6(-4.05,0.25) 7(-4.05,-0.25) 8(-4.05,-0.75) 9(-4.05,-1.25) 10(-4.05,-1.75) 11(-4.05,-2.25) 12(-4.05,-2.75) 25(4.05,-2.75) 26(4.05,-2.25) 27(4.05,-1.75) 28(4.05,-1.25) 29(4.05,-0.75) 30(4.05,-0.25) 31(4.05,0.25) 32(4.05,0.75) 33(4.05,1.25) 34(4.05,1.75) 35(4.05,2.25) 36(4.05,2.75)
  oval 0.3x1.8 smd: 13(-2.75,-4.05) 14(-2.25,-4.05) 15(-1.75,-4.05) 16(-1.25,-4.05) 17(-0.75,-4.05) 18(-0.25,-4.05) 19(0.25,-4.05) 20(0.75,-4.05) 21(1.25,-4.05) 22(1.75,-4.05) 23(2.25,-4.05) 24(2.75,-4.05) 37(2.75,4.05) 38(2.25,4.05) 39(1.75,4.05) 40(1.25,4.05) 41(0.75,4.05) 42(0.25,4.05) 43(-0.25,4.05) 44(-0.75,4.05) 45(-1.25,4.05) 46(-1.75,4.05) 47(-2.25,4.05) 48(-2.75,4.05)
  silkscreen extent -4.17,-2.75 2.75,3.57, body extent -3.5,-3.5 3.5,3.5, height 1.6
DSUB_MALE [mm] "Connector; D Subminiature; 9 Position; Right Angle; Pitch 1.385 mm"
  rect 1.69x1.69 hole 1.09: 1(-5.52,1.27)
  round 1.69 hole 1.09: 2(-2.76,1.27) 3(0,1.27) 4(2.76,1.27) 5(5.52,1.27) 6(-4.14,-1.27) 7(-1.38,-1.27) 8(1.38,-1.27) 9(4.14,-1.27)
  round 4.76 hole 3.4: 10(-12.5,0) 11(12.5,0)
  silkscreen extent -15.4,-17.78 15.4,2.89, body extent -15.43,-17.9 15.43,2.93, height 13.55
ECA1HM471 [mm] "PANASONIC - ECA1HM471 - CAPACITOR, 470UF, 50V"
  round 1.2 hole 0.65: 1(-2.5,0) 2(2.5,0)
  silkscreen extent -5,-5 5,5, body extent -5,-4.89 4.96,5.09, height 20
FDC608PZ [mm] "FAIRCHILD SEMICONDUCTOR - FDC608PZ - MOSFET, P, SMD, SSOT-6"
  rect 1.1x0.7 smd: 1(-1.3,0.95) 2(-1.3,0) 3(-1.3,-0.95) 4(1.3,-0.95) 5(1.3,0) 6(1.3,0.95)
  silkscreen extent -1.32,-1.5 0.25,1.92, body extent -0.85,-1.5 0.85,1.5, height 1.1
HDR1X2 [mm] "Connector; Header; 2 Position"
  rect 1.5x1.5 hole 0.9: 1(0,0)
  round 1.5 hole 0.9: 2(2.54,0)
  silkscreen extent -1.27,-1.27 3.81,1.27
HDR1X4 [mm] "Connector; Header; 4 Position"
  rect 1.5x1.5 hole 0.9: 1(0,0)
  round 1.5 hole 0.9: 2(2.54,0) 3(5.08,0) 4(7.62,0)
  silkscreen extent -1.27,-1.27 8.89,1.27
HDR2X10 [mm] "Connector; Header; 10x2 Position"
  rect 1.5x1.5 hole 0.9: 1(0,0)
  round 1.5 hole 0.9: 2(0,2.54) 3(2.54,0) 4(2.54,2.54) 5(5.08,0) 6(5.08,2.54) 7(7.62,0) 8(7.62,2.54) 9(10.16,0) 10(10.16,2.54) 11(12.7,0) 12(12.7,2.54) 13(15.24,0) 14(15.24,2.54) 15(17.78,0) 16(17.78,2.54) 17(20.32,0) 18(20.32,2.54) 19(22.86,0) 20(22.86,2.54)
  silkscreen extent -5.27,-3.43 28.13,5.97, body extent -5.07,-3.18 27.93,5.72, height 9.1
JST_S4B-XH-A [mm] "JST (JAPAN SOLDERLESS TERMINALS) - S4B-XH-A (LF)(SN) - HEADER, RIGHT ANGLE, 4WAY"
  rect 1.5x1.5 hole 0.95: 1(7.5,2.3)
  round 1.5 hole 0.95: 2(5,2.3) 3(2.5,2.3) 4(0,2.3)
  silkscreen extent -2.7,0 10.2,11.5, body extent -2.45,0 9.95,11.5, height 6.1
LGR971-Z [mm] "OSRAM - LGR971-Z - LED, SMD, GREEN"
  rect 1.2x1.2 smd: 1(0,0) 2(2.1,0)
  silkscreen extent 0.9,-0.5 1.2,0.5, body extent 0.2,-0.6 2,0.6, height 0.9
LM3674MF-ADJ [mm] "SOT23, 5-Leads, Body 3.0x3.0mm (max), Pitch 0.95mm, IPC Medium Density"
  rect 1.05x0.6 smd mask+0.112: 1(-1.225,0.953) 2(-1.225,0) 3(-1.225,-0.953)
  rect 1.05x0.6 smd: 4(1.225,-0.953) 5(1.225,0.953)
  silkscreen extent -1.35,-1.5 0.3,1.93, body extent -0.83,-1.5 0.84,1.5, height 1.22
LPC1768 [mm] "TSQFP, 100-Leads, Body 16.8x16.8mm (max), Pitch 0.50mm, IPC Medium Density"
  oval 1.8x0.3 smd: 1(-7.8,6) 2(-7.8,5.5) 3(-7.8,5) 4(-7.8,4.5) 5(-7.8,4) 6(-7.8,3.5) 7(-7.8,3) 8(-7.8,2.5) 9(-7.8,2) 10(-7.8,1.5) 11(-7.8,1) 12(-7.8,0.5) 13(-7.8,0) 14(-7.8,-0.5) 15(-7.8,-1) 16(-7.8,-1.5) 17(-7.8,-2) 18(-7.8,-2.5) 19(-7.8,-3) 20(-7.8,-3.5) 21(-7.8,-4) 22(-7.8,-4.5) 23(-7.8,-5) 24(-7.8,-5.5) 25(-7.8,-6) 51(7.8,-6) 52(7.8,-5.5) 53(7.8,-5) 54(7.8,-4.5) 55(7.8,-4) 56(7.8,-3.5) 57(7.8,-3) 58(7.8,-2.5) 59(7.8,-2) 60(7.8,-1.5) 61(7.8,-1) 62(7.8,-0.5) 63(7.8,0) 64(7.8,0.5) 65(7.8,1) 66(7.8,1.5) 67(7.8,2) 68(7.8,2.5) 69(7.8,3) 70(7.8,3.5) 71(7.8,4) 72(7.8,4.5) 73(7.8,5) 74(7.8,5.5) 75(7.8,6)
  oval 0.3x1.8 smd: 26(-6,-7.8) 27(-5.5,-7.8) 28(-5,-7.8) 29(-4.5,-7.8) 30(-4,-7.8) 31(-3.5,-7.8) 32(-3,-7.8) 33(-2.5,-7.8) 34(-2,-7.8) 35(-1.5,-7.8) 36(-1,-7.8) 37(-0.5,-7.8) 38(0,-7.8) 39(0.5,-7.8) 40(1,-7.8) 41(1.5,-7.8) 42(2,-7.8) 43(2.5,-7.8) 44(3,-7.8) 45(3.5,-7.8) 46(4,-7.8) 47(4.5,-7.8) 48(5,-7.8) 49(5.5,-7.8) 50(6,-7.8) 76(6,7.8) 77(5.5,7.8) 78(5,7.8) 79(4.5,7.8) 80(4,7.8) 81(3.5,7.8) 82(3,7.8) 83(2.5,7.8) 84(2,7.8) 85(1.5,7.8) 86(1,7.8) 87(0.5,7.8) 88(0,7.8) 89(-0.5,7.8) 90(-1,7.8) 91(-1.5,7.8) 92(-2,7.8) 93(-2.5,7.8) 94(-3,7.8) 95(-3.5,7.8) 96(-4,7.8) 97(-4.5,7.8) 98(-5,7.8) 99(-5.5,7.8) 100(-6,7.8)
  silkscreen extent -7.92,-6.5 6.5,6.82, body extent -7,-7 7,7, height 1.6
MAX3232ECDG4 [mm] "SOIC, 16-Leads, Body 10.0x4.0mm (max), Pitch 1.27mm, IPC Medium Density"
  oval 2.25x0.6 smd: 1(-2.6,4.445) 2(-2.6,3.175) 3(-2.6,1.905) 4(-2.6,0.635) 5(-2.6,-0.635) 6(-2.6,-1.905) 7(-2.6,-3.175) 8(-2.6,-4.445) 9(2.6,-4.445) 10(2.6,-3.175) 11(2.6,-1.905) 12(2.6,-0.635) 13(2.6,0.635) 14(2.6,1.905) 15(2.6,3.175) 16(2.6,4.445)
  silkscreen extent -2.72,-5 1.07,5.42, body extent -2,-5 2,5, height 1.75
MC0603 [mm]
  rect 1x1 smd: 1(-0.8,0) 2(0.8,0)
  silkscreen extent 0,-0.4 0,0.4, body extent -0.85,-0.48 0.85,0.47, height 0.45
MCP2551-I/SN [mm]
  oval 1.7x0.6 smd: 1(-2.65,1.905) 2(-2.65,0.635) 3(-2.65,-0.635) 4(-2.65,-1.905) 5(2.65,-1.905) 6(2.65,-0.635) 7(2.65,0.635) 8(2.65,1.905)
  silkscreen extent -2.77,-2.5 1.4,2.88, body extent -1.99,-2.5 1.99,2.5, height 1.75
MICROSD_SLOT [mm]
  rect 0.8x1.8 smd mask+0.086: 1(-10.54,16.7) 2(-9.44,16.7) 3(-8.34,16.7) 4(-7.24,16.7) 5(-6.14,16.7) 6(-5.04,16.7) 7(-3.94,16.7) 8(-2.84,16.7)
  rect 1.55x2.8 smd: 9(-0.775,13.95)
  rect 1.55x2.1 smd: 10(-0.775,6.55)
  rect 1.7x3.4 smd: ""(-16.15,15)
  rect 1.7x3.6 smd: ""(-16.15,5.45)
  rect 1.7x2.2 smd: ""(-15.45,0.8) ""(-0.85,1.8)
  rect 1.6x1.55 smd: ""(-12.64,16.125)
  silkscreen extent -16.5,-6 -0.3,16.6, body extent -15.8,0 -0.8,16.3, height 1.95
"MOLEX - 39303035" [mm] "MOLEX - 39303035 - HEADER, MINI-FIT, R/A, SIL, 3WAY"
  rect 2.6x2.6 hole 1.9: 1(-4.2,0)
  round 2.6 hole 1.9: 2(0,0) 3(4.2,0)
  round 3.6 hole 3.1: ""(-4.2,-7.3) ""(4.2,-7.3)
  silkscreen extent -7.4,-13.55 7.4,-0.6, body extent -6.9,-13.55 6.9,-1.1, height 7.2
NetTie [mm] "Net Tie"
  rect 1.2x1.2 smd: 1(-0.2,0) 2(1.2,0)
  Top Layer lines w1: -0.2,0 1.2,0
RJMG163118101NR [mm] "AMPHENOL - RJMG163118101NR - JACK, 10/100 BASE T, ROHS5"
  round 1.6 hole 1: 1(5.075,0) 2(3.045,0) 3(1.015,0) 4(-1.015,0) 5(-3.045,0) 6(-5.075,0) 7(7.23,2.45) 8(4.69,2.45) 9(-4.69,2.45) 10(-7.23,2.45)
  round 4 hole 3.4: 11(6.35,-11.18) 12(-6.35,-11.18)
  round 2.4 hole 1.7: 13(8.065,-14.35) 14(-8.065,-14.35)
  silkscreen extent -8.4,-22.13 8.4,3.6, body extent -8.4,-22.15 8.4,3.6, height 13.61
STM811 [mm] "SOT143, 4-Leads, Body 3.0x2.6mm (max), Pitch 1.92mm, IPC Medium Density"
  rect 1.35x1.05 smd: 1(-1.025,0.76)
  rect 1.35x0.65 smd: 2(-1.025,-0.96) 3(1.025,-0.96) 4(1.025,0.96)
  silkscreen extent -1.15,-1.6 0.7,1.96, body extent -0.7,-1.52 0.7,1.52, height 1.12
USB_B_292304-1 [mm] "TYCO ELECTRONICS / AMP - 292304-1 - RECEPTACLE, USB, R/A, TYPE B"
  round 1.6 hole 1.1: 1(7.27,4.71) 2(4.77,4.71) 3(4.77,2.71) 4(7.27,2.71)
  round 3.2 hole 2.5: 5(0,0) 6(12.04,0)
  silkscreen extent -0.2,-10.4 12.2,5.82, body extent 0,-10.2 12,5.5, height 11.05
XO91050UITA [mm] "EUROQUARTZ - 50.000MHZ XO91050UITA - OSC, 5X7MM, SMD, CER, 50.000MHZ"
  rect 2x2 smd: 1(0,0) 2(5,0) 3(5,4.2) 4(0,4.2)
  silkscreen extent -2.1,-1.8 6.5,5.5, body extent -1.6,-1.3 6.5,5.5, height 1.4

## Part data
C1 C2 C4 C5 C6 C7 C8 C9 C10 C11 C12 C13 C14 C15 C16 C17 C18 C19 C20 C21 C22 C23 C24 C25 C26 C27 C28 C29 C30 C31 C32 C33 C34 C35 C36 C37 C38 C39 C40 C41 C42 C43 C44 C45 C46 C47 C48 C49 C50 C51 C52 C53 C54 C55 C56 C57 C58 C59 C60: "Capacitor"
C3: "Polarized Capacitor (Radial)"
CONN1: "CONNECTOR, MICRO SD, PUSH/PUSH"
CONN2: "10/100 BASE T"
D1 D2 D3 D4 D5 D6 D7 D8 D9 D10: library part LED2, "Typical RED, GREEN, YELLOW, AMBER GaAs LED"
J1 J2 J3 J5: "Receptacle Assembly, 9 Position, Right Angle"
J4: "USB connector"
L1 L3: library part Inductor, "Inductor"
NT1: library part NetTie
P1: "Header, 3-Pin, Right Angle"
P2: "Header, 2-Pin"
P3: "Header, 4-Pin, Right Angle"
P4: "Header, 10-Pin, Dual row"
P5 P6: "Header, 4-Pin"
Q1: "FAIRCHILD SEMICONDUCTOR - FDC608PZ - MOSFET, P, SMD, SSOT-6"
Q2: "P-Channel MOSFET"
R1 R2 R3 R4 R5 R6 R7 R8 R9 R10 R11 R12 R13 R14 R15 R16 R17 R18 R19 R20 R21 R22 R23 R24 R25 R26 R27 R28 R29 R30 R31 R32 R33 R34 R39 R40 R41 R42 R43 R44 R45 R46 R47 R48 R49 R50 R51 R52 R53 R54 R55: library part Res2, "Resistor"
R35 R36 R37 R38: library part Res1, "Resistor"
S1 S2 S3: "Switch"
U1: "Reset Supervisor (Active-Low)"
U2: "5V STEP DOWN CONV, 600MA, POWERWISE"
U3 U5 U7: "3.0V TO 5.5V, Low-Power, up to 1Mbps, True RS-232 Transceiver Using Four 0.1µF External Capacitor"
U6: "100mbit Ethernet PHY"
U8: "High-speed CAN Transceiver, 1Mb/s"
Y1: "Crystal Oscillator"

## Free pads (board coordinates)
  round 6 hole 4: ""(120,118) ""(120,196) ""(256,118) ""(256,196)

## Via types
v1: diameter 0.6, hole 0.3, Top Layer to Bottom Layer, 146 vias
v2: diameter 0.6, hole 0.3, Top Layer to Bottom Layer, tented top, 95 vias

## Nets (pads, with @x,y where several pads share a name; then routed paths per layer and width w, separated by ;. In a path a pad name is that pad's centre, name@x,y a point inside that pad or via, vN(x,y) a via of type N, cw(c..) or ccw(c..) an arc to the next point about the centre after c; other vN are vias at no path point)
+3.3: C2.2 C4.2 C6.2 C10.2 C11.2 C18.1 C19.1 C20.1 C23.2 C24.1 C27.1 C33.1 C34.1 C35.2 C37.2 C38.1 C39.1 C40.2 C42.2 C51.2 C53.2 C54.2 C55.1 C56.1 CONN1.4 CONN2.1 CONN2.6 L2.2 L3.1 OSC1.4 P4.1 P4.2 P5.1 P6.1 Q2.3 R1.2 R2.2 R4.2 R8.2 R10.2 R11.2 R12.2 R14.1 R15.2 R18.2 R19.2 R20.2 R21.2 R22.2 R23.2 R24.2 R25.2 R29.2 R30.2 R31.2 R32.2 R33.2 R34.2 R35.2 R36.2 R37.2 R38.2 R39.2 R46.2 R48.2 R52.2 R53.2 U1.4 U3.16 U4.10 U4.12 U4.19 U4.28 U4.42 U4.54 U4.71 U4.84 U4.96 U5.16 U6.32 U6.48 U7.16 | length 170.8
  Top Layer w0.3: C20.1@183.4,165.439 184.714,164.125 U4.10@185.6,164.125 ; C18.1@183.825,163.125 U4.12@185.6,163.125 ; 184.375,159.625 U4.19@185.6,159.625 ; 188.4,153.4 U4.28@188.4,154.825 ; U4.96@189.4,170.425 189.4,171.7 ; C33.1@195.4,153.125 U4.42@195.4,154.825 ; U4.84@195.4,170.425 195.4,172 195.9,172.5 ; U4.54@201.2,158.125 C38.1@203.55,158.125 ; U4.71@201.2,166.625 C39.1@203.55,166.625 ; 206.875,179.75 U6.48@208.25,179.75 ; U6.32@211.55,186.55 211.55,187.7
  Top Layer w0.4: v1(122.55,158.65) 122.55,157.475 123.15,156.875 R1.2@123.15,156.25 ; v1(123.225,131.025) 123.425,131.225 R2.2@123.425,132.475 ; v1(128.525,156.15) R4.2@129.95,156.15 ; C2.2@129.9,141.675 129.9,142.907 U1.4@129.9,144.04 ; CONN1.4@135.15,164.79 C4.2@137.31,164.79 ; C4.2@137.375,164.625 137.375,165.9 v1(137.625,166.15) ; v1(146.6,149.95) R10.2@147.85,148.7 ; v1@146.6,150.08 R11.2@147.86,151.34 v1(146.625,152.575) ; v1@146.625,152.745 R12.2@147.86,153.98 ; v1(146.8,160.625) 146.8,160.345 R14.1@147.86,159.285 ; v1@146.8,160.85 R15.2@147.875,161.925 ; R18.2@156.35,193.75 R19.2@159.35,193.75 R21.2@165.35,193.75 R23.2@171.35,193.75 R24.2@174.35,193.75 v1(175.875,193.75) ; U3.16@179.373,143.572 180.101,144.3 C23.2@181.825,144.3 v1(183.525,144.3) ; v1(180.925,192.6) 180.925,193.855 181.02,193.951 R25.2@181.049,193.951 ; C20.1@183.4,165.6 183.4,165.439 C19.1@183.4,161.45 184.125,160.725 184.125,159.875 184.375,159.625 ; v2(186.325,153.7) 186.325,153.75 185.4,152.825 C24.1@185.4,152.55 187.55,152.55 188.4,153.4 ; v1(186.925,173.75) C27.1@188.6,173.75 188.6,172.5 189.4,171.7 ; v1(189.925,192.6) 189.925,193.825 R29.2@190.05,193.95 ; v1(194.275,152.525) 194.3,152.55 C33.1@195.975,152.55 ; 195.9,172.5 195.9,172.8 C34.1@196.8,173.7 ; C34.1@196.85,173.9 197.75,173.9 v1(198.45,174.6) ; C35.2@200.625,192.875 v1(202.2,192.875) ; U5.16@201.3,143.095 C37.2@203.52,143.095 ; v1(203.55,156.475) C38.1@203.55,158.125 ; C39.1@203.55,166.625 203.55,167.8 v1(204.15,168.4) ; C37.2@203.7,143.275 v1(205.375,143.275) ; R30.2@205.125,135.45 v1(206.725,135.45) ; 206.875,179.75 206.05,178.925 C40.2@206.05,178.3 v1(207.6,176.75) ; v1(209.95,189.75) C42.2@211.2,189.75 211.55,189.4 211.55,187.7 ; v1(211.4,195) 211.425,194.975 R39.2@217.375,194.975 ; U7.16@222.475,143.395 224.77,143.395 C51.2@224.875,143.5 226.75,143.5 v1(226.775,143.475) ; R35.2@223.6,174.5 v2@224.4,175.3 ; R36.2@223.6,176 v2(224.3,175.3) v2@224.4,175.3 ; R37.2@223.6,179.1 v2(224.3,179.8) v2@224.4,179.8 ; R38.2@223.6,180.6 v2@224.4,179.8 ; C53.2@225.25,175.3 v2@224.4,175.3 ; C54.2@225.25,179.8 v2@224.4,179.8 ; v1(232.45,161.225) Q2.3@232.45,162.3 ; R53.2@242.575,158.175 v1(244.025,158.175)
  Top Layer w0.5: C6.2@135.8,185.025 C6.2@136.175,185.4 ; OSC1.4@200.45,189.925 C35.2@200.45,192.7 ; v1(203.1,184.3) 203.7,184.9 R31.2@204.6,184.9 ; R46.2@235.9,172.15 C55.1@237.8,172.15 CONN2.6@237.8,177.875 ; R48.2@236.375,193.85 236.625,193.6 C56.1@237.8,193.6 ; CONN2.1@237.8,188.025 237.8,193.55 C56.1@238.1,193.85 R52.2@241.325,193.85
  Top Layer w0.75: 134.975,185.075 v1(134.975,187.275)
  Top Layer w1: 151.85,196.55 L3.1@153.475,196.55
  Bottom Layer w0.75: v1@134.95,187.25 135.325,187.625 149.075,187.625 150.25,186.45 150.25,185.2 v2(150.225,185.175)
  other v1: 129.9,143 239.9,193.85
  other v2: 183.4,162.5 183.4,164.575 149.05,189.525 151.05,189.525 149.05,191.525 151.05,191.525 149.05,193.525 151.05,193.525 149.05,195.525 151.05,195.525
+3.3A: C12.2 C47.2 L3.2 R41.2 R42.2 U6.22 | length 87.6
  Top Layer w0.3: U6.22@216.35,184.25 217.4,184.25
  Top Layer w0.4: 217.4,184.25 217.443,184.25 C47.2@218.975,185.782 ; v2(217.45,186.225) 217.525,186.225 217.925,185.825 C47.2@218.975,185.825
  Top Layer w0.75: R41.2@220.4,194.975 R42.2@221.9,194.975 221.925,195 v1(223.5,195)
  Top Layer w1: L3.2@155.5,196.55 C12.2@156.9,196.55 ; C12.2@157.825,196.55 221.95,196.55 v1(223.5,195)
  Bottom Layer w1: v2(217.45,186.225) 218.375,186.225 223.5,191.35 v1(223.5,195)
+5: C3.1 C7.2 C8.2 C52.2 L1.2 P3.1 R3.2 R6.2 U2.1 U2.3 U8.3 | length 248.4
  Top Layer w0.5: v1(141.7,177.425) U2.3@141.7,179.297
  Top Layer w0.75: C52.2@231.515,144.065 U8.3@233.675,144.065 234.56,144.065 v1(236.19,144.065)
  Top Layer w1: v1(128.4,132.125) R3.2@128.4,133.35 ; L1.2@131.7,197.3 137.125,197.3 C3.1@138.15,196.275 ; v1(133.525,132.125) R6.2@133.525,133.35
  Bottom Layer w2: 121.725,123.275 118.475,126.525 118.475,170.6 124.025,176.15 v1(126.1,176.15) ; 121.75,123.3 P3.1@127.05,123.3 ; 126.475,176.15 v1(126.1,176.15) ; v1(129.825,176.15) v1(127.95,176.15) v1(126.1,176.15) ; v1(133.525,132.125) v1(128.4,132.125) 127.05,130.775 P3.1@127.05,123.3 ; v1(236.19,144.065) 244.775,135.48 244.775,121.125 240.025,116.375 132.325,116.375 127.05,121.65 P3.1@127.05,123.3
  other v1: 133.45,197.325 134.95,197.325 136.45,197.325
  other v2: 138.025,183.475 140.125,183.475 138.025,185.55 140.125,185.55
A\C\T\_\L\E\D\: CONN2.9 R39.1 U6.26 | length 41.2
  Top Layer w0.3: U6.26@214.55,187.436 U6.26@214.55,186.55 214.55,190.25 217.375,193.075 R39.1@217.375,193.375
  Bottom Layer w0.5: v1(216.375,191.95) 218.885,194.46 219.611,195.186 220.625,196.2 224.5,196.2 229.2,191.5 229.2,184.41 CONN2.9@235.35,178.26
AGND: C12.1 C47.1 NT1.2 U6.15 U6.19 | length 104.4
  Top Layer w0.3: 214.55,182.75 U6.19@216.35,182.75 ; v2@214.575,180.75 U6.15@216.35,180.75
  Top Layer w0.4: 214.55,182.75 214.025,182.225 214.025,181.3 v2@214.575,180.75
  Top Layer w0.5: C47.1@220.675,185.825 221.8,185.825 v1(222.125,186.15)
  Top Layer w1: NT1.2@150.275,198.4 222.3,198.4 225.325,195.375 v1(225.325,189.375)
  Bottom Layer w0.75: v2(214.4,180.75) 216.725,180.75
  Bottom Layer w1: 216.725,180.75 v1(222.125,186.15) ; v1@222.125,186.175 v1(225.325,189.375)
CAN_N: J5.6 U8.6 | length 17.9
  Top Layer w0.3: U8.6@238.975,144.065 240.16,144.065 243.875,140.35 243.875,136.3 246.84,133.335 J5.6@250.07,133.335
CAN_P: J5.2 U8.7 | length 15
  Top Layer w0.3: U8.7@238.975,145.335 240.365,145.335 244.9,140.8 244.9,137.345 J5.2@247.53,134.715
CAN_RXD: R43.1 U8.4 | length 2.3
  Top Layer w0.3: R43.1@231.7,142.025 232.905,142.025 U8.4@233.675,142.795
CAN_TXD: R44.1 U8.1 | length 2.3
  Top Layer w0.3: R44.1@231.7,147.35 232.93,147.35 U8.1@233.675,146.605
ENET_RD_N: CONN2.5 R35.1 U6.13 | length 27
  Top Layer w0.3: U6.13@216.35,179.75 217.5,179.75
  Top Layer w0.4: 217.55,179.7 217.921,179.329 217.921,178.579 221.286,175.214 R35.1@222,174.5 ; R35.1@222.105,174.5 222.105,174.345 222.9,173.55 227.6,173.55 229.021,174.971 230.071,174.971 235.005,179.905 CONN2.5@237.8,179.905
ENET_RD_P: CONN2.4 R36.1 U6.14 | length 27.2
  Top Layer w0.3: U6.14@216.35,180.25 217.625,180.25
  Top Layer w0.4: 217.625,180.25 217.925,180.25 218.575,179.6 218.575,178.85 220.711,176.714 221.286,176.714 R36.1@222,176 ; R36.1@222.105,176 222.105,176.155 222.9,176.95 227.675,176.95 229,175.625 229.8,175.625 234.734,180.559 236.424,180.559 CONN2.4@237.8,181.935
ENET_TD_N: CONN2.3 R37.1 U6.16 | length 25.8
  Top Layer w0.3: U6.16@216.35,181.25 217.575,181.25
  Top Layer w0.4: 217.575,181.2 218.075,181.2 219.329,179.946 221.154,179.946 R37.1@222,179.1 222.239,178.888 222.239,178.728 222.816,178.15 227.725,178.15 229.049,179.474 231.072,179.474 236.25,184.653 237.112,184.653 CONN2.3@237.8,183.965
ENET_TD_P: CONN2.2 R38.1 U6.17 | length 25.3
  Top Layer w0.3: U6.17@216.35,181.75 217.55,181.75
  Top Layer w0.4: 217.55,181.75 218.45,181.75 219.6,180.6 R38.1@222,180.6 ; R38.1@222.105,180.6 222.105,180.755 222.9,181.55 227.628,181.55 229.05,180.128 230.801,180.128 235.979,185.307 237.112,185.307 CONN2.2@237.8,185.995
GND: C1.1 C2.1 C3.2 C4.1 C5.1 C7.1 C8.1 C9.2 C10.1 C11.1 C13.1 C16.1 C17.2 C18.2 C19.2 C20.2 C21.2 C22.2 C23.1 C24.2 C25.1 C26.2 C27.2 C28.2 C29.1 C32.1 C33.2 C34.2 C35.1 C36.1 C37.1 C38.2 C39.2 C40.1 C41.1 C42.1 C43.1 C46.1 C48.1 C49.1 C50.1 C51.1 C52.1 C53.1 C54.1 C55.2 C56.2 C57.2 C58.2 C59.2 C60.2 CONN1.6 CONN1.10 CONN2.11 CONN2.12 CONN2.13 CONN2.14 D2.2 J1.5 J2.5 J3.5 J4.4 J5.1 J5.7 J5.9 NT1.1 OSC1.2 P1.1 P2.2 P3.4 P4.4 P4.6 P4.8 P4.10 P4.12 P4.14 P4.16 P4.18 P4.20 P5.4 P6.4 R5.1 R7.1 R9.1 R13.2 R16.1 R17.1 R26.1 R40.1 R47.1 R49.1 R51.1 R54.1 R55.1 S1.1 S2.1 S3.1 U1.1 U2.2 U3.15 U4.11 U4.15 U4.31 U4.41 U4.55 U4.72 U4.83 U4.97 U5.15 U6.35 U6.36 U6.47 U7.15 U8.2 | length 152
  Top Layer w0.3: v2(133.26,162.59) CONN1.6@135.15,162.59 ; C4.1@139.075,164.625 v1(139.075,166.3) ; U4.15@185.6,161.625 186.486,161.625 186.861,162 188.75,162 189.075,161.675 v2(189.175,161.675) ; U4.11@185.6,163.625 187.475,163.625 187.6,163.75 v2(187.6,163.975) ; U4.97@188.9,170.425 188.9,169.2 v2(189.4,168.7) ; v2(189.55,156.575) 189.9,156.225 U4.31@189.9,154.825 ; U4.41@194.9,154.825 194.9,155.975 195.5,156.575 195.764,156.575 v2(196,156.575) ; U4.83@195.9,170.425 195.9,171.775 196.4,172.275 197,172.875 198.025,172.875 199.325,174.175 199.325,175.075 v1(198.5,175.9) ; v2(199.425,158.625) U4.55@201.2,158.625 ; U4.72@201.2,167.125 202.225,167.125 202.575,167.475 202.575,168.575 v1(204.15,170.15) ; v1@205.65,180.25 U6.47@208.25,180.25 ; v2(208.45,186.55) U6.35@210.05,186.55
  Top Layer w0.4: CONN1.10@125,158.325 v2@125,159.825 ; v1(125.125,146.3) C1.1@125.125,148.325 ; R5.1@131.75,194.75 v1(131.75,196.05) ; C2.1@131.775,141.5 v1(133.3,141.5) ; C2.1@131.95,141.675 U1.1@131.95,144.24 ; v1(146.455,156.645) R13.2@147.86,156.645 ; R17.1@147.575,169.375 v1(147.575,168.2) 147.575,167.345 R16.1@148.02,166.9 ; D2.2@156.35,188.85 156.375,188.875 157.35,188.875 157.825,189.35 v1(157.825,190.7) ; v1@171.75,145.625 C16.1@173.7,145.625 ; v1(171.773,132.952) C13.1@171.773,134.452 ; C17.2@177.65,159.3 177.65,157.15 v1(178.25,156.55) 179.6,155.2 C22.2@179.6,155.15 ; v1(178.475,133.175) C21.2@178.475,131.725 180.225,131.725 R26.1@180.275,131.675 ; U3.15@179.373,142.302 C23.1@181.527,142.302 ; C19.2@181.7,161.45 C18.2@181.7,163.55 C20.2@181.7,165.6 ; C23.1@181.825,142.6 v1@183.25,142.6 ; v1@183.25,142.6 v1(183.525,142.6) ; v1@185.4,148.5 C24.2@185.4,150.85 C26.2@187.5,150.85 ; C25.1@186.275,194.2 v1(188.05,194.2) ; v1(190.75,134.375) 190.75,134.35 190.975,134.125 C29.1@193.625,134.125 ; C28.2@192.6,150.85 C33.2@196.2,150.85 ; v1(195.325,192.45) C32.1@195.325,194.175 ; U5.15@201.3,141.825 C37.1@203.45,141.825 ; v1(202.55,130.3) C36.1@202.55,131.95 ; C37.1@203.7,141.575 v1(205.375,141.575) ; v1(205.25,156.475) C38.2@205.25,158.125 ; C39.2@205.25,166.625 205.25,167.55 v1(206.075,168.375) ; v1(209.925,191.45) C42.1@211.2,191.45 ; v1(214.875,132.8) C43.1@214.875,134.475 ; C46.1@216.8,145.3 v1(216.8,147.175) ; R40.1@218.9,194.975 R40.1@218.9,195.159 ; R40.1@218.9,195.16 R40.1@218.911,195.16 ; U7.15@222.475,142.125 C51.1@224.55,142.125 ; C51.1@224.875,141.8 v1(226.775,141.8) ; C53.1@226.95,175.3 v2(228.1,175.3) ; C54.1@226.95,179.8 v2(228.1,179.8) ; v1(229.775,145.55) C52.1@231.45,145.55 ; C52.1@231.815,145.335 U8.2@233.675,145.335 ; R47.1@237.725,148.3 v1(237.725,149.725) ; v1@237.8,168.75 C55.2@237.8,170.45 ; R49.1@239.25,131.45 C57.2@240.95,131.45 ; v1(241.225,148.725) C59.2@242.9,148.725 ; C59.2@242.7,148.775 R51.1@242.7,150.825 ; CONN2.13@252.15,191.015 CONN2.13@252.15,191.575 ; C60.2@252.925,171.575 252.975,171.525 R55.1@255,171.525
  Top Layer w0.5: C9.2@142.727,131.502 v1(142.727,133.073) ; C9.2@142.777,131.452 R9.1@144.527,131.452 ; C27.2@188.6,175.45 v1(188.6,177.2) ; OSC1.2@196.25,184.925 v2(198.325,184.925) ; C34.2@196.8,175.25 197.45,175.9 v1(198.5,175.9) ; v1(197.475,192.875) C35.1@198.925,192.875 ; v1(202.8,186.7) C41.1@204.35,186.7 ; C40.1@204.35,178.3 204.35,178.95 v1(205.5,180.1) ; C48.1@220.675,187.825 v1(220.675,191.4) ; C50.1@221.35,183 222.825,183 223.95,184.125 v1(223.95,184.15) ; v1(236.8,197.1) 238.1,195.8 C56.2@238.1,195.55
  Top Layer w0.75: C58.2@241.15,165.25 R54.1@242.7,165.25 243.775,165.25 v1(244.2,165.675) ; v1(250,194.5) 250,193.725 CONN2.13@252.15,191.575
  Top Layer w1: 146.85,198.425 NT1.1@148.5,198.425
  Bottom Layer w0.4: v1@146.45,156.65 v1(146.455,156.645)
  other v1: 171.725,145.6 185.5,148.4 186.525,150.85 194.275,150.85 237.775,168.725
  other v2: 239.95,131.45 125,160 181.7,162.5 181.7,164.575 254.1,171.525 138,179.55 140.125,179.55 142.925,180.25 138.025,181.65 140.125,181.65 142.95,181.75 145.025,183.55 145.025,185.85 144.05,189.525 146.05,189.525 144.05,191.525 146.05,191.525 144.05,193.525 146.05,193.525 144.05,195.525 146.05,195.525 218.9,195.575 144.05,197.525 146.05,197.525
I2C_SCL: P3.2 R3.1 U4.24 | length 76.7
  Top Layer w0.3: P3.2@129.55,123.3 130,123.75 130,133.89 132.485,136.375 155.01,136.375 172.36,153.725 182.275,153.725 184.125,155.575 184.125,156.7 184.55,157.125 U4.24@185.6,157.125
I2C_SDA: P3.3 R6.1 U4.25 | length 74.6
  Top Layer w0.3: P3.3@132.05,123.3 131.925,123.425 R6.1@131.925,133.35 131.925,134.825 132.775,135.675 155.3,135.675 172.65,153.025 182.565,153.025 184.4,154.86 185.6,156.06 U4.25@185.6,156.625
JTAG0: P4.13 R15.1 U4.1 | length 40.8
  Top Layer w0.3: R15.1@149.46,161.725 149.46,161.935 150.5,162.975 156.35,162.975 P4.13@157.61,161.715 ; P4.13@157.978,161.348 P4.13@157.61,161.715 ; U4.1@185.6,168.625 184.775,168.625 184.625,168.775 180.141,168.775 165.425,168.775 158.365,161.715 P4.13@157.61,161.715